# Altium PCB PCB.PcbDoc
Units mm, origin at the board's own origin, x right, y up, seen from the top; angles counter-clockwise.
Board outline 100 x 70 mm, 2 copper layers (Top Layer, Bottom Layer), stack 0.112 mm thick; 24 components, 41 nets, 128 pads, 7 vias.
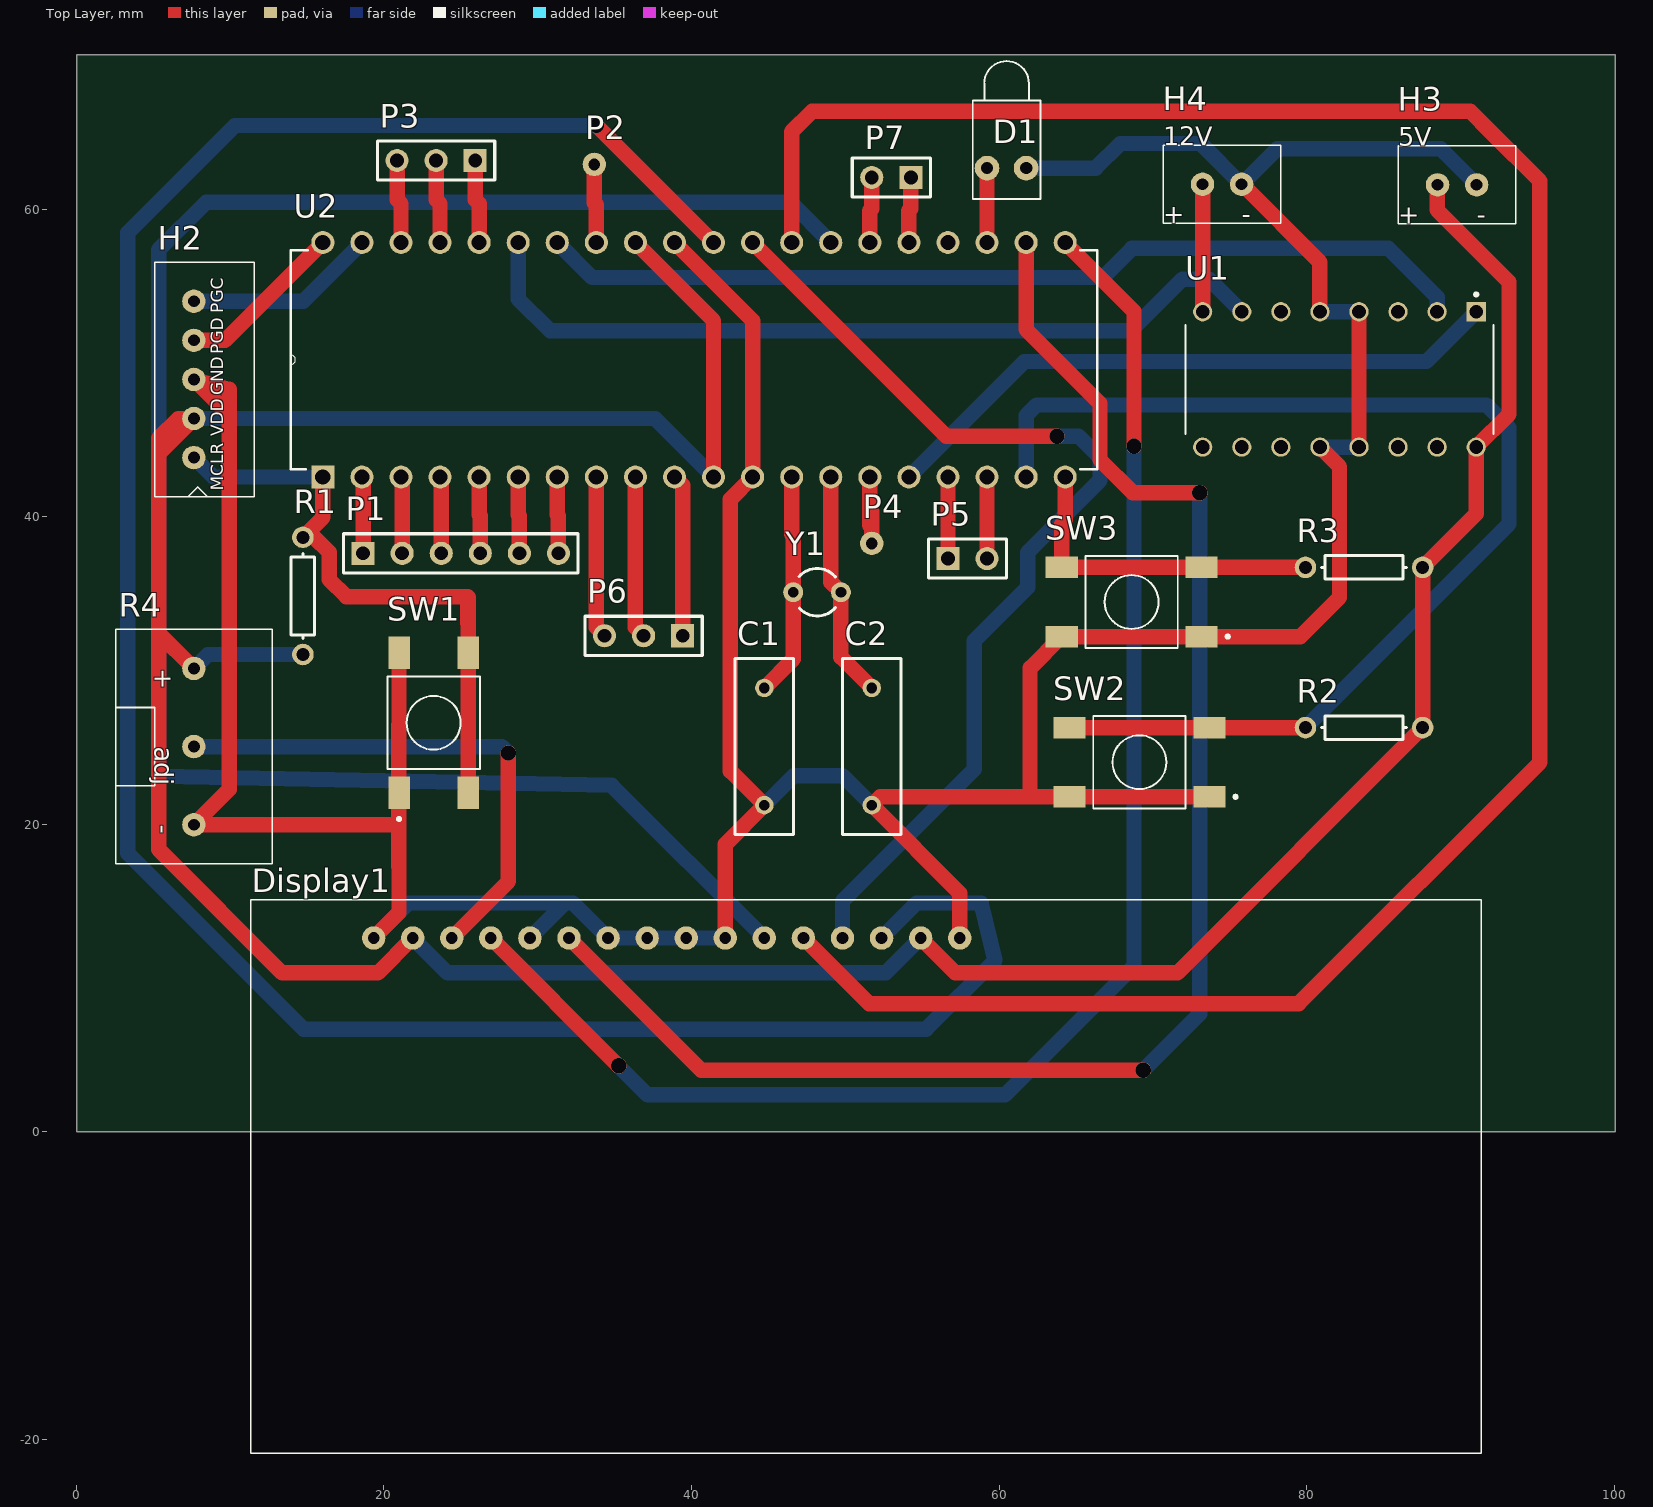
[diagram p0: Top Layer view]
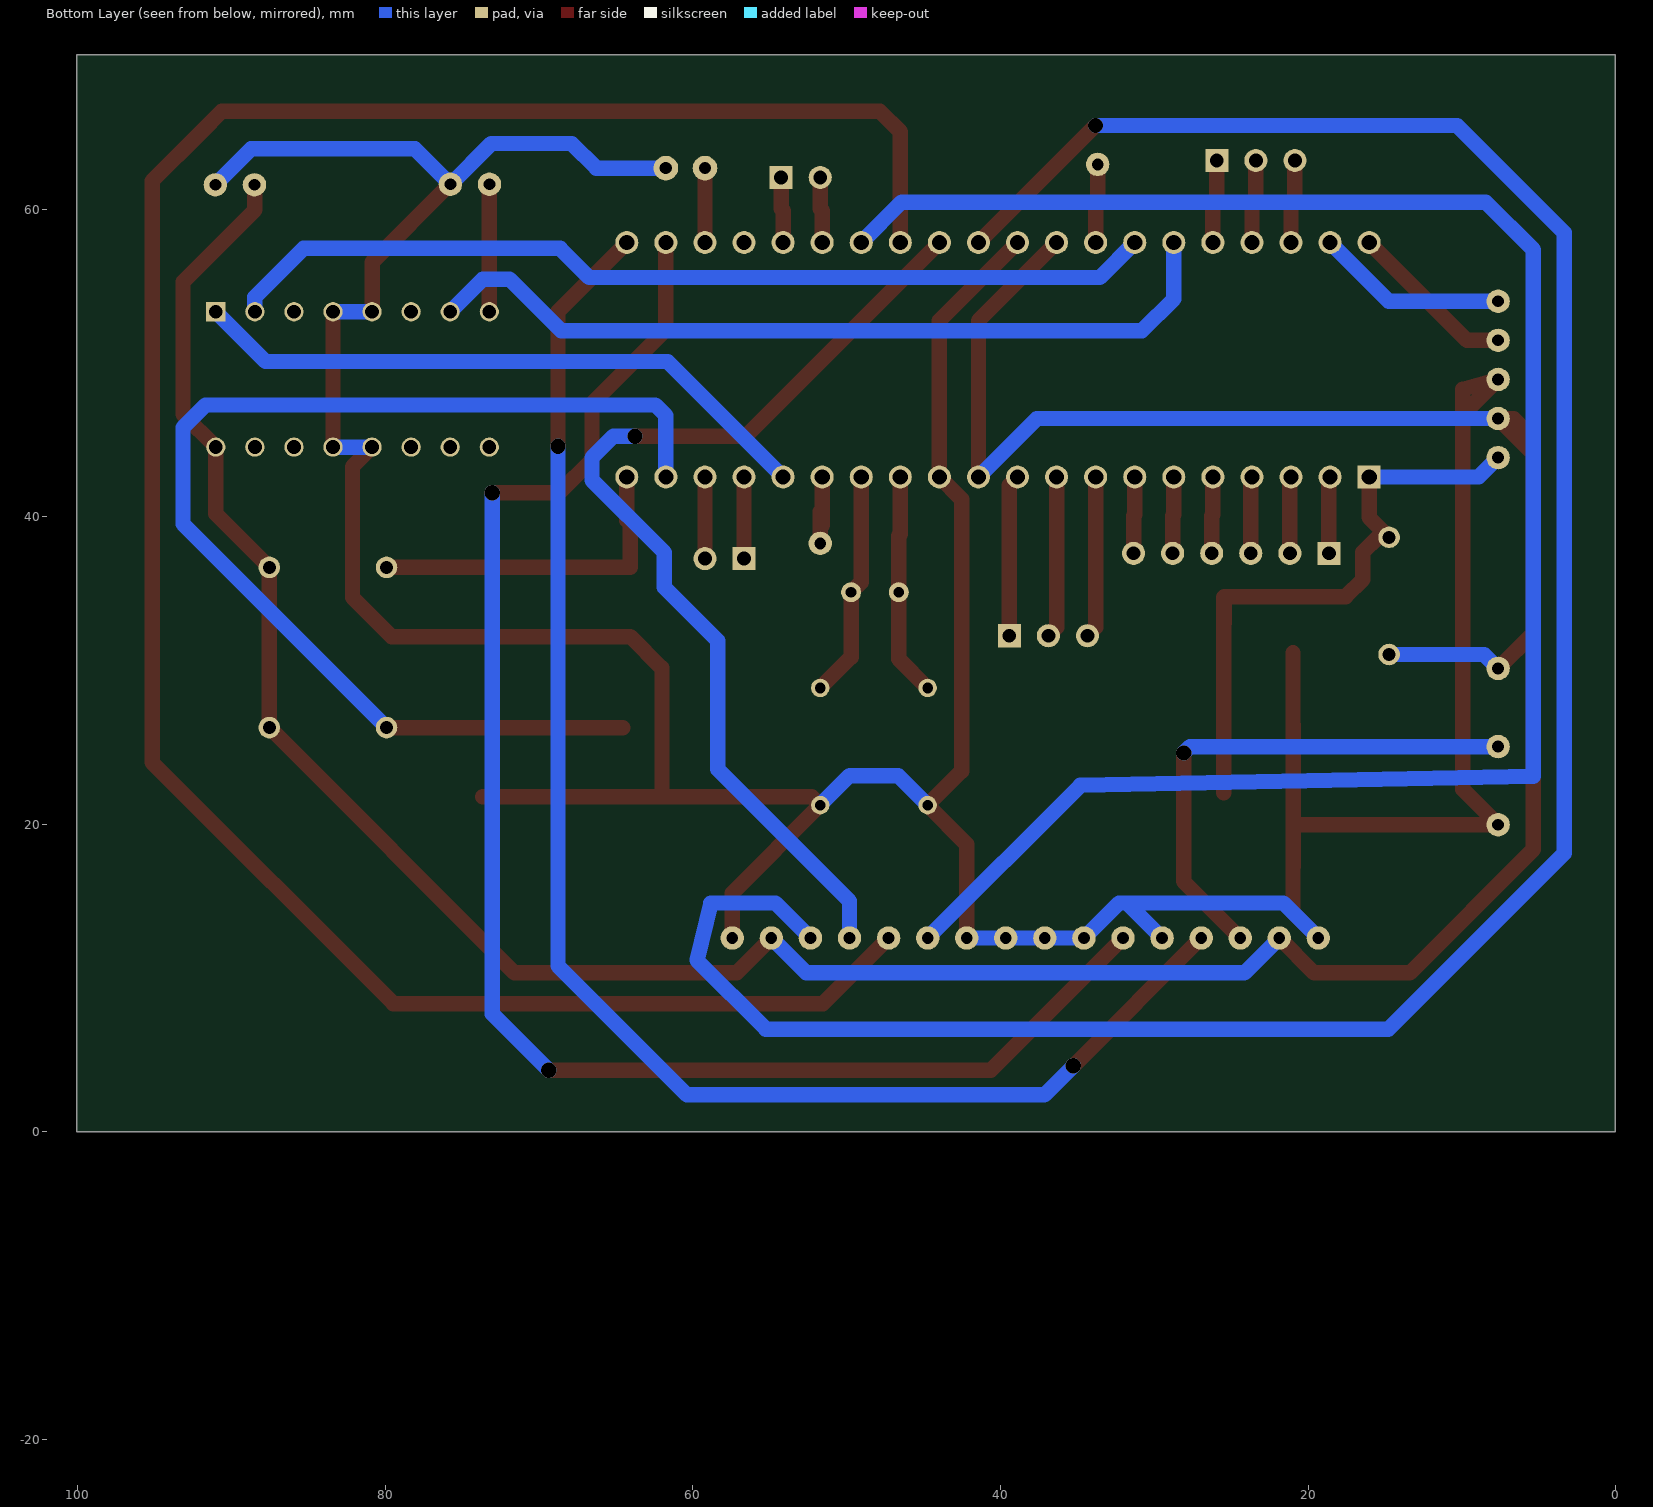
[diagram p1: Bottom Layer view, seen from below]

## Layer stack, top to bottom
Top Solder: solder mask 0.0102, Solder Resist, Dk 3.5
Top Layer: signal copper 0.0356
Dielectric 1: dielectric 0.0406, FR-4, Dk 4.8
Bottom Layer: signal copper 0.0356
Bottom Solder: solder mask 0.0102, Solder Resist, Dk 3.5

## Board outline
0.038,70.02 100.038,70.02 100.038,0.02 0.038,0.02

## Design rules (kind name [scope] priority, off if disabled: settings)
Clearance [All] p1: gap=0.5 ignorepadtopadclearanceinfootprint=FALSE
PolygonConnect [All] p1: connectstyle=Relief reliefconductorwidth=0.254 reliefentries=4 polygonreliefangle="90 Angle" airgapwidth=0.254
RoutingVias [All] p1: holewidth=1 width=1 viastyle="Through Hole" minholewidth=1 minwidth=1 maxholewidth=1 maxwidth=1
SilkToSilkClearance [All] p1 off: silktosilkclearance=0.254
SilkToSolderMaskClearance [IsPad] p1 off: minsilkscreentomaskgap=0.254 clearancetoexposedcopper=TRUE
SolderMaskExpansion [All] p1: expansion=0.102
Width [All] p1: maxlimit=3 minlimit=1 preferedwidth=1
28 further rules are at their usual default settings.

## Components (designator, comment, footprint, x,y, rotation, side; value= is the part's Value field where it differs from the comment)
C1 "Cap" RAD-0.3 44.729,25.054 r90 top value=22pF
C2 "Cap" RAD-0.3 51.714,25.054 r90 top value=22pF
D1 "LED1" LED-1 60.477,62.662 r90 top
Display1 "LCD 16 x 2" LCD16X2 11.329,15.108 r0 top
H2 "PICKIT programmer" PICKIT 7.645,43.84 r90 top
H3 "Prikljucak 5V" "H 5V" 88.494,61.57 r0 top
H4 "Prikljucak 12V" "H 12V" 73.215,61.608 r0 top
P1 "Header 6" HDR1X6 18.644,37.617 r0 top
P2 "Header 1" "HEADER 1" 33.68,62.9 r0 top
P3 "Header 3" HDR1X3 25.933,63.154 r180 top
P4 "Header 1" "HEADER 1" 51.714,38.262 r0 top
P5 "Header 2" HDR1X2 56.667,37.272 r0 top
P6 "Header 3" HDR1X3 39.421,32.258 r180 top
P7 "Header 2" HDR1X2 54.254,62.052 r180 top
R1 "Res1" AXIAL-0.3 14.732,34.849 r270 top value=10K
R2 "Res1" AXIAL-0.3 83.718,26.288 r0 top value=10K
R3 "Res1" AXIAL-0.3 83.718,36.702 r0 top value=10K
R4 "Potenciometar" ADJ_RES 7.645,25.054 r270 top
SW1 "2-1437565-8" *SW_SMD_2-1437565-8_4_4.50_6.00_6.00_5.00 23.23,26.6 r90 top
SW2 "2-1437565-8" *SW_SMD_2-1437565-8_4_4.50_6.00_6.00_5.00 69.113,24.038 r180 top
SW3 "2-1437565-8" *SW_SMD_2-1437565-8_4_4.50_6.00_6.00_5.00 68.605,34.452 r180 top
U1 "L293D" *DIP880W50P254L2000H510Q16 82.118,48.92 r270 top
U2 "PIC16F877A-E/P" *DIP254P1524X483-40 64.287,57.82 r90 top
Y1 "XTAL" R38 48.158,35.087 r90 top

## Footprints (in the part's own frame and the unit in brackets; to place one, negate y for a bottom-side part, rotate by r counter-clockwise, add the part's x,y. Pads: shape width x height; smd on the part's side, far side on the other; paste and mask are expansions set on the pad)
*DIP254P1524X483-40 [mil]
  rect 59x59 hole 39: 1(-600,1900)
  round 59 hole 39: 2(-600,1800) 3(-600,1700) 4(-600,1600) 5(-600,1500) 6(-600,1400) 7(-600,1300) 8(-600,1200) 9(-600,1100) 10(-600,1000) 11(-600,900) 12(-600,800) 13(-600,700) 14(-600,600) 15(-600,500) 16(-600,400) 17(-600,300) 18(-600,200) 19(-600,100) 20(-600,0) 21(0,0) 22(0,100) 23(0,200) 24(0,300) 25(0,400) 26(0,500) 27(0,600) 28(0,700) 29(0,800) 30(0,900) 31(0,1000) 32(0,1100) 33(0,1200) 34(0,1300) 35(0,1400) 36(0,1500) 37(0,1600) 38(0,1700) 39(0,1800) 40(0,1900)
  silkscreen extent -580,-82 -20,1982
*DIP880W50P254L2000H510Q16 [mm]
  rect 1.25x1.25 hole 0.9: 1(-4.4,8.89)
  round 1.25 hole 0.9: 2(-4.4,6.35) 3(-4.4,3.81) 4(-4.4,1.27) 5(-4.4,-1.27) 6(-4.4,-3.81) 7(-4.4,-6.35) 8(-4.4,-8.89) 9(4.4,-8.89) 10(4.4,-6.35) 11(4.4,-3.81) 12(4.4,-1.27) 13(4.4,1.27) 14(4.4,3.81) 15(4.4,6.35) 16(4.4,8.89)
  silkscreen extent -5.62,-10 3.55,10
*SW_SMD_2-1437565-8_4_4.50_6.00_6.00_5.00 [mm]
  rect 2.1x1.4 smd: 1(-4.55,2.25) 2(4.55,2.25) 3(-4.55,-2.25) 4(4.55,-2.25)
  silkscreen extent -6.35,-3 3,3
ADJ_RES [mil] "Promenljivi Otpornik"
  round 60 hole 30: 1(-200,0) 2(200,0) 3(0,0)
  silkscreen extent -300,-200 300,200
AXIAL-0.3 [mm] "Axial Device, Thru-Hole; 2 Leads; 0.3 in Pin Spacing"
  round 1.4 hole 0.85: 1(-3.81,0) 2(3.81,0)
  silkscreen extent -2.77,-0.76 2.77,0.76
"H 5V" [mil] "prikljucak 5 volti"
  round 60 hole 30: 1(0,0) 2(100,0)
  silkscreen extent -100,-100 200,100
"H 12V" [mil] "prikljucak 12V"
  round 60 hole 30: 1(0,0) 2(100,0)
  silkscreen extent -100,-100 200,100
HDR1X2 [mm] "Connector; Header; 2 Position"
  rect 1.5x1.5 hole 0.9: 1(0,0)
  round 1.5 hole 0.9: 2(2.54,0)
  silkscreen extent -1.27,-1.27 3.81,1.27
HDR1X3 [mm] "Connector; Header; 3 Position"
  rect 1.5x1.5 hole 0.9: 1(0,0)
  round 1.5 hole 0.9: 2(2.54,0) 3(5.08,0)
  silkscreen extent -1.27,-1.27 6.35,1.27
HDR1X6 [mm] "Connector; Header; 6 Position"
  rect 1.5x1.5 hole 0.9: 1(0,0)
  round 1.5 hole 0.9: 2(2.54,0) 3(5.08,0) 4(7.62,0) 5(10.16,0) 6(12.7,0)
  silkscreen extent -1.27,-1.27 13.97,1.27
"HEADER 1" [mil]
  round 60 hole 30: 1(0,0)
LCD16X2 [mil] "LCD16x2"
  round 60 hole 30: 1(314.96,-98.43) 2(414.96,-98.43) 3(514.96,-98.43) 4(614.96,-98.43) 5(714.96,-98.43) 6(814.96,-98.43) 7(914.96,-98.43) 8(1014.96,-98.43) 9(1114.96,-98.43) 10(1214.96,-98.43) 11(1314.96,-98.43) 12(1414.96,-98.43) 13(1514.96,-98.43) 14(1614.96,-98.43) 15(1714.96,-98.43) 16(1814.96,-98.43)
  silkscreen extent 0,-1417 3150,0
LED-1 [mm] "LED; 2 Leads"
  round 1.6 hole 0.8: 1(0,1.27) 2(0,-1.27)
  silkscreen extent -2,-2.2 6.95,2.2
PICKIT [mil] "Programator"
  round 60 hole 30: 1(0,0) 2(100,0) 3(200,0) 4(300,0) 5(400,0)
  silkscreen extent -100,-155 500,100
R38 [mm] "Crystal, Thru-Hole; 2 Leads; Body 3.1 x 8.2 mm (Dia.xH)"
  round 1.3 hole 0.7: 1(0,1.55) 2(0,-1.55)
  silkscreen extent -1.55,-1.19 1.55,1.17
RAD-0.3 [mm] "Radial Cap, Thru-Hole; 2 Leads; 0.3 in Pin Spacing"
  round 1.2 hole 0.7: 1(-3.81,0) 2(3.81,0)
  silkscreen extent -5.71,-1.9 5.72,1.91

## Part data
C1 C2: "Capacitor", LatestRevisionDate=17-Jul-2002, LatestRevisionNote="Re-released for DXP Platform.", PackageDescription="Radial Cap, Thru-Hole; 2 Leads; 0.3 in Pin Spacing", PackageReference=RAD-0.3, Published=8-Jun-2000, Publisher="Altium Limited"
D1: "Typical RED GaAs LED", LatestRevisionDate=08-Jul-2005, LatestRevisionNote="Mech Layer 1 removed.", PackageDescription="LED; 2 Leads", PackageReference=LED-1, Published=8-Jun-2000, Publisher="Altium Limited"
Display1: library part "LCD 16 X 2"
H2: library part "PICKIT HEADER"
H3: library part "Header 5V"
H4: library part "Header 12V"
P1: "Header, 6-Pin", LatestRevisionDate=17-Jul-2002, LatestRevisionNote="Re-released for DXP Platform.", Publisher="Altium Limited"
P3 P6: "Header, 3-Pin", LatestRevisionDate=17-Jul-2002, LatestRevisionNote="Re-released for DXP Platform.", Publisher="Altium Limited"
P5 P7: "Header, 2-Pin", LatestRevisionDate=17-Jul-2002, LatestRevisionNote="Re-released for DXP Platform.", Publisher="Altium Limited"
R1 R2 R3: "Resistor", LatestRevisionDate=17-Jul-2002, LatestRevisionNote="Re-released for DXP Platform.", PackageDescription="Axial Device, Thru-Hole; 2 Leads; 0.3 in Pin Spacing", PackageReference=AXIAL-0.3, Published=8-Jun-2000, Publisher="Altium Limited"
R4: library part ADJ_RES
SW1 SW2 SW3: "Tactile Switch SPST-NO Top Actuated Surface Mount", Contact_Current_Rating="50 mA", Package=None, Availability=Unavailable, Configuration_Pole-Throw="Single Pole - Single Throw", MF="TE Connectivity", MP=2-1437565-8, Price=None, SnapEDA_Link=https://www.snapeda.com/parts/2-1437565-8/TE%20Connectivity%20ALCOSWITCH%20Switches/view-part/455292/?ref=snap, TE_purchase_URL=https://www.te.com/usa-en/product-2-1437565-8.html?te_bu=Cor&te_type=disp&te_campaign=seda_glo_cor-seda-global-disp-prtnr-fy19-seda-model-bom-cta_sma-317_1&elqCampaignId=32493
U1: "Motor Driver"
U2: "Enhanced FLASH Microcontroller, 8K (x14-Bit words) FLASH, 368 Bytes RAM, 40-Pin PDIP, Standard VDD Range, Extended Temperature", Supplier Part Number 1=PIC16F877A-E/P-ND, ComponentAvailability="Unknown. Contact manufacturer to determine status.", ComponentLink1Description=Datasheet, ComponentLink1URL=http://ww1.microchip.com/downloads/en/DeviceDoc/39582b.pdf, ComponentLink2Description="Packaging Specification", ComponentLink2URL=http://www.microchip.com/stellent/groups/techpub_sg/documents/packagingspec/en012702.pdf, ComponentLink3Description="Microchip.com Home", ComponentLink3URL=http://www.microchip.com/, DatasheetVersion="revB, Oct-2003", LatestRevisionDate=29-Jan-2009, LatestRevisionNote="Sch. layout revised. 3D Model Removed.", PackageDescription="40-Lead Plastic Dual In-Line (P) - 600 mil Body [PDIP]", PackageReference=PDIP600-P40, PackageVersion="revBB, Aug-2009", Published=11-Oct-2004, Publisher="Altium Limited", Supplier 1=Digi-Key, Supplier 2=Farnell, Supplier Part Number 2=1567990
Y1: "Crystal Oscillator", LatestRevisionDate=17-Jul-2002, LatestRevisionNote="Re-released for DXP Platform.", PackageDescription="Crystal, Thru-Hole; 2 Leads; Body 3.1 x 8.2 mm (Dia.xH)", PackageReference=R38, Published=8-Jun-2000, Publisher="Altium Limited"

## Via types
v1: diameter 1, hole 1, Top Layer to Bottom Layer, 7 vias

## Nets (pads, with @x,y where several pads share a name; then routed paths per layer and width w, separated by ;. In a path a pad name is that pad's centre, name@x,y a point inside that pad or via, vN(x,y) a via of type N, cw(c..) or ccw(c..) an arc to the next point about the centre after c; other vN are vias at no path point)
+5V: Display1.2 Display1.15 H2.2 H3.1 R1.2 R2.2 R3.2 R4.1 U1.16 U2.11 U2.32 | length 231.6
  Top Layer w1: R4.1 5.359,32.42 ; Display1.2 19.599,10.338 13.386,10.338 5.359,18.364 5.359,32.42 ; U2.32 41.427,52.74 41.427,43.917 U2.11 ; Display1.15 57.151,10.346 71.586,10.346 R2.2 R3.2 91.008,40.182 U1.16 93.142,46.654 93.142,55.27 88.468,59.944 H3.1@88.468,61.62 ; 5.359,32.42 5.359,44.095 ; 5.359,44.095 5.359,45.11 6.629,46.38 H2.2 5.359,44.095
  Bottom Layer w1: R4.1 8.55,31.039 R1.2 ; H2.2 37.627,46.38 U2.11 ; Display1.2 24.14,10.338 52.619,10.338 Display1.15
+12V: H4.1 U1.8 | length 8.3
  Top Layer w1: U1.8 H4.1@73.228,61.62
GND: C1.1 C2.1 D1.2 Display1.1 Display1.5 Display1.7 Display1.8 Display1.9 Display1.10 Display1.16 H2.3 H3.2 H4.2 R4.2 SW1.1 SW1.2 SW2.1 SW2.2 SW3.1 SW3.2 U1.4 U1.5 U1.12 U1.13 U2.12 U2.31 | length 284.9
  Top Layer w1: Display1.1 20.98,14.259 20.955,19.968 ; SW1.2 20.96,22.05 20.955,19.968 ; U2.31 43.967,52.74 U2.12 42.52,41.133 42.52,23.454 C1.1 42.189,18.704 Display1.10 ; Display1.16 57.429,15.529 C2.1 52.258,21.788 62.001,21.788 ; SW2.1 62.001,21.788 ; H4.2@75.768,61.62 80.848,56.54 U1.5 ; U1.12 82.118,43.25 82.118,34.742 79.578,32.202 SW3.2 62.028,30.175 62.001,30.175 62.001,21.788 ; U1.13 U1.4 ; 9.931,46.634 9.931,48.285 H2.3 9.931,46.634 ; 9.931,46.634 9.931,22.261 R4.2 7.652,19.968 20.955,19.968
  Bottom Layer w1: Display1.1 21.605,14.884 31.765,14.884 ; Display1.5 31.765,14.884 ; Display1.10 Display1.7 32.293,14.884 31.765,14.884 ; C1.1 46.643,23.158 49.8,23.158 C2.1 ; D1.2 66.269,62.662 67.869,64.262 73.101,64.262 H4.2 78.054,63.906 88.722,63.906 H3.2@91.008,61.62 ; U1.12 U1.13 ; U1.5 U1.4
NetC1_2: C1.2 U2.13 Y1.1 | length 14.5
  Top Layer w1: C1.2 46.608,30.743 Y1.1 46.608,38.76 46.507,38.861 U2.13
NetC2_2: C2.2 U2.14 Y1.2 | length 14.8
  Top Layer w1: U2.14 49.047,35.748 Y1.2 49.708,30.87 C2.2
NetD1_1: D1.1 U2.23 | length 4.8
  Top Layer w1: U2.23 D1.1
NetDisplay1_3: Display1.3 R4.3 | length 34.2
  Top Layer w1: Display1.3 28.092,16.292 28.092,18.542 v1(28.092,24.638)
  Bottom Layer w1: R4.3 27.676,25.054 v1(28.092,24.638)
NetDisplay1_4: Display1.4 U2.21 | length 98.4
  Top Layer w1: Display1.4 v1(35.255,4.302) ; U2.21 68.758,53.35 v1(68.758,44.579)
  Bottom Layer w1: v1(35.255,4.302) 37.145,2.413 60.376,2.413 68.758,10.795 v1(68.758,44.579)
NetDisplay1_6: Display1.6 U2.22 | length 103.4
  Top Layer w1: Display1.6 40.624,4.013 v1(69.367,4.013) ; U2.22 61.747,52.172 66.548,47.371 66.548,43.688 68.682,41.554 v1(73.025,41.554)
  Bottom Layer w1: v1(69.367,4.013) 73.025,7.671 v1(73.025,41.554)
NetDisplay1_11: Display1.11 U2.27 | length 123.8
  Bottom Layer w1: Display1.11 34.808,22.53 5.359,23.114 5.359,57.353 8.458,60.452 46.416,60.452 U2.27
NetDisplay1_12: Display1.12 U2.28 | length 152.2
  Top Layer w1: U2.28 46.507,62.433 46.507,65.024 47.828,66.345 90.627,66.345 91.948,65.024 95.148,61.824 95.148,24.028 79.466,8.346 51.531,8.346 Display1.12
NetDisplay1_13: Display1.13 U2.29 | length 66.5
  Top Layer w1: U2.29 56.55,45.237 v1(63.754,45.237)
  Bottom Layer w1: Display1.13 49.809,15.011 58.369,23.571 58.369,31.928 61.849,35.408 61.849,37.668 66.548,42.367 66.548,43.84 65.151,45.237 v1(63.754,45.237)
NetDisplay1_14: Display1.14 U2.30 | length 158.7
  Top Layer w1: v1(33.817,65.43) U2.30
  Bottom Layer w1: v1(33.817,65.43) 10.312,65.43 3.353,58.471 3.353,18.11 14.783,6.68 55.245,6.68 59.715,11.151 58.826,14.884 54.625,14.884 Display1.14
NetH1_2: U2.24
NetH1_5: U1.6
NetH2_1: H2.1 R1.1 SW1.3 SW1.4 U2.1 | length 43.1
  Top Layer w1: U2.1 16.027,39.954 R1.1 15.469,38.659 16.434,37.694 16.434,35.916 17.551,34.798 25.455,34.798 25.455,34.773 ; SW1.3 SW1.4 ; 25.455,34.773 SW1.4 ; 25.455,34.773 25.48,34.773 ; 25.455,34.773 25.48,34.773 ; SW1.4 25.48,34.773
  Bottom Layer w1: H2.1 8.905,42.58 U2.1
NetH2_4: H2.4 U2.40 | length 11
  Top Layer w1: H2.4 9.667,51.46 U2.40
NetH2_5: H2.5 U2.39 | length 12.5
  Bottom Layer w1: H2.5 14.747,54 U2.39
NetP1_1: P1.1 U2.2 | length 5
  Top Layer w1: U2.2 18.644,42.504 P1.1
NetP1_2: P1.2 U2.3 | length 5
  Top Layer w1: U2.3 21.184,42.504 P1.2
NetP1_3: P1.3 U2.4 | length 5
  Top Layer w1: U2.4 23.724,42.504 P1.3
NetP1_4: P1.4 U2.5 | length 5
  Top Layer w1: U2.5 26.187,40.132 26.264,40.056 P1.4
NetP1_5: P1.5 U2.6 | length 5
  Top Layer w1: U2.6 28.727,40.132 28.804,40.056 P1.5
NetP1_6: P1.6 U2.7 | length 5
  Top Layer w1: U2.7 31.267,40.132 31.344,40.056 P1.6
NetP2_1: P2.1 U2.33 | length 5.1
  Top Layer w1: P2.1 33.68,60.401 33.807,60.274 U2.33
NetP3_1: P3.1 U2.36 | length 5.4
  Top Layer w1: P3.1 25.933,60.604 26.187,60.35 U2.36
NetP3_2: P3.2 U2.37 | length 5.4
  Top Layer w1: P3.2 23.393,60.604 23.647,60.35 U2.37
NetP3_3: P3.3 U2.38 | length 5.4
  Top Layer w1: P3.3 20.853,60.604 21.107,60.35 U2.38
NetP4_1: P4.1 U2.15 | length 5.6
  Top Layer w1: U2.15 51.587,40.462 ; P4.1 51.714,39.304 ; 51.587,40.462 51.587,39.431 51.714,39.304 ; 51.587,40.462 51.714,40.335 51.714,39.304
NetP5_1: P5.1 U2.17 | length 7.9
  Top Layer w1: U2.17 56.667,39.904 ; 56.667,39.904 P5.1 56.667,39.903
NetP5_2: P5.2 U2.18 | length 7.9
  Top Layer w1: U2.18 59.207,39.904 ; 59.207,39.904 P5.2 59.207,39.903
NetP6_1: P6.1 U2.10 | length 10.5
  Top Layer w1: U2.10 39.421,42.047 P6.1
NetP6_2: P6.2 U2.9 | length 10.5
  Top Layer w1: U2.9 36.347,32.792 P6.2
NetP6_3: P6.3 U2.8 | length 10.5
  Top Layer w1: U2.8 33.807,32.792 P6.3
NetP7_1: P7.1 U2.25 | length 4.4
  Top Layer w1: U2.25 54.127,59.893 54.254,60.02 P7.1@54.254,62.138
NetP7_2: P7.2 U2.26 | length 4.4
  Top Layer w1: U2.26 51.587,59.893 51.714,60.02 P7.2@51.714,62.138
NetR2_1: R2.1 SW2.3 SW2.4 U2.19 | length 76.6
  Top Layer w1: SW2.4 SW2.3 R2.1
  Bottom Layer w1: U2.19 61.747,46.576 62.433,47.262 91.676,47.262 93.142,45.796 93.142,39.522 R2.1
NetR3_1: R3.1 SW3.3 SW3.4 U2.20 | length 21.8
  Top Layer w1: U2.20 64.287,39.754 64.055,39.522 SW3.4 SW3.3 R3.1
NetU1_1: U1.1 U2.16 | length 41.3
  Bottom Layer w1: U2.16 61.635,50.088 87.776,50.088 U1.1
NetU1_2: U1.2 U2.34 | length 61.2
  Bottom Layer w1: U2.34 33.538,55.55 66.732,55.55 68.627,57.445 85.303,57.445 88.468,54.28 U1.2
NetU1_7: U1.7 U2.35 | length 53.8
  Bottom Layer w1: U2.35 28.727,54.153 30.792,52.088 68.556,52.088 71.913,55.445 73.643,55.445 U1.7
pads on no net: U1.3 U1.9 U1.10 U1.11 U1.14 U1.15

## Text inside footprints (layer, text, board x,y; h text height)
H2: Top Overlay "PGC" at 9.55,53.238 h0.8 r90; Top Overlay "PGD" at 9.55,50.571 h0.8 r90; Top Overlay "GND" at 9.55,47.904 h0.8 r90; Top Overlay "VDD" at 9.55,45.237 h0.8 r90; Top Overlay "MCLR" at 9.55,41.681 h0.8 r90
H3: Top Overlay "-" at 91.034,59.03 h1.2; Top Overlay "+" at 85.954,59.03 h1.2; Top Overlay "5V" at 85.954,64.11 h1.2
H4: Top Overlay "-" at 75.755,59.068 h1.2; Top Overlay "+" at 70.675,59.068 h1.2; Top Overlay "12V" at 70.675,64.148 h1.2
R4: Top Overlay "+" at 5.105,30.134 h1.2 r270; Top Overlay "-" at 5.105,19.974 h1.2 r270; Top Overlay "adj" at 5.105,25.054 h1.2 r270